# EAGLE board PCB_board (EAGLE 9.6.2)
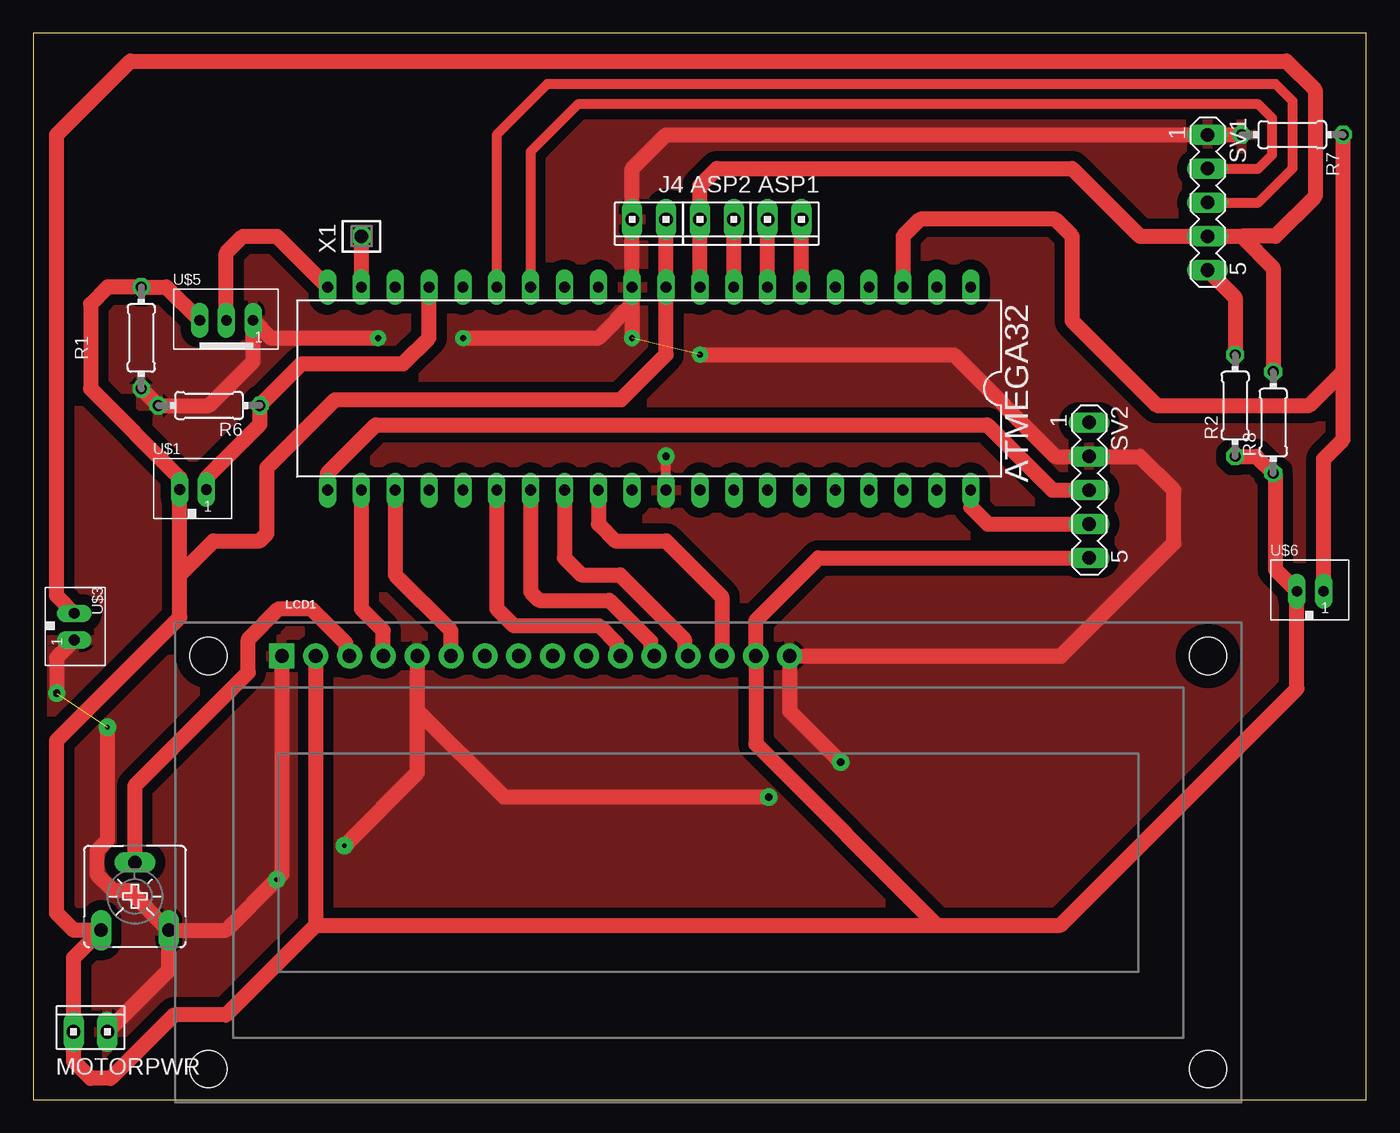
[diagram p0: board, top side]
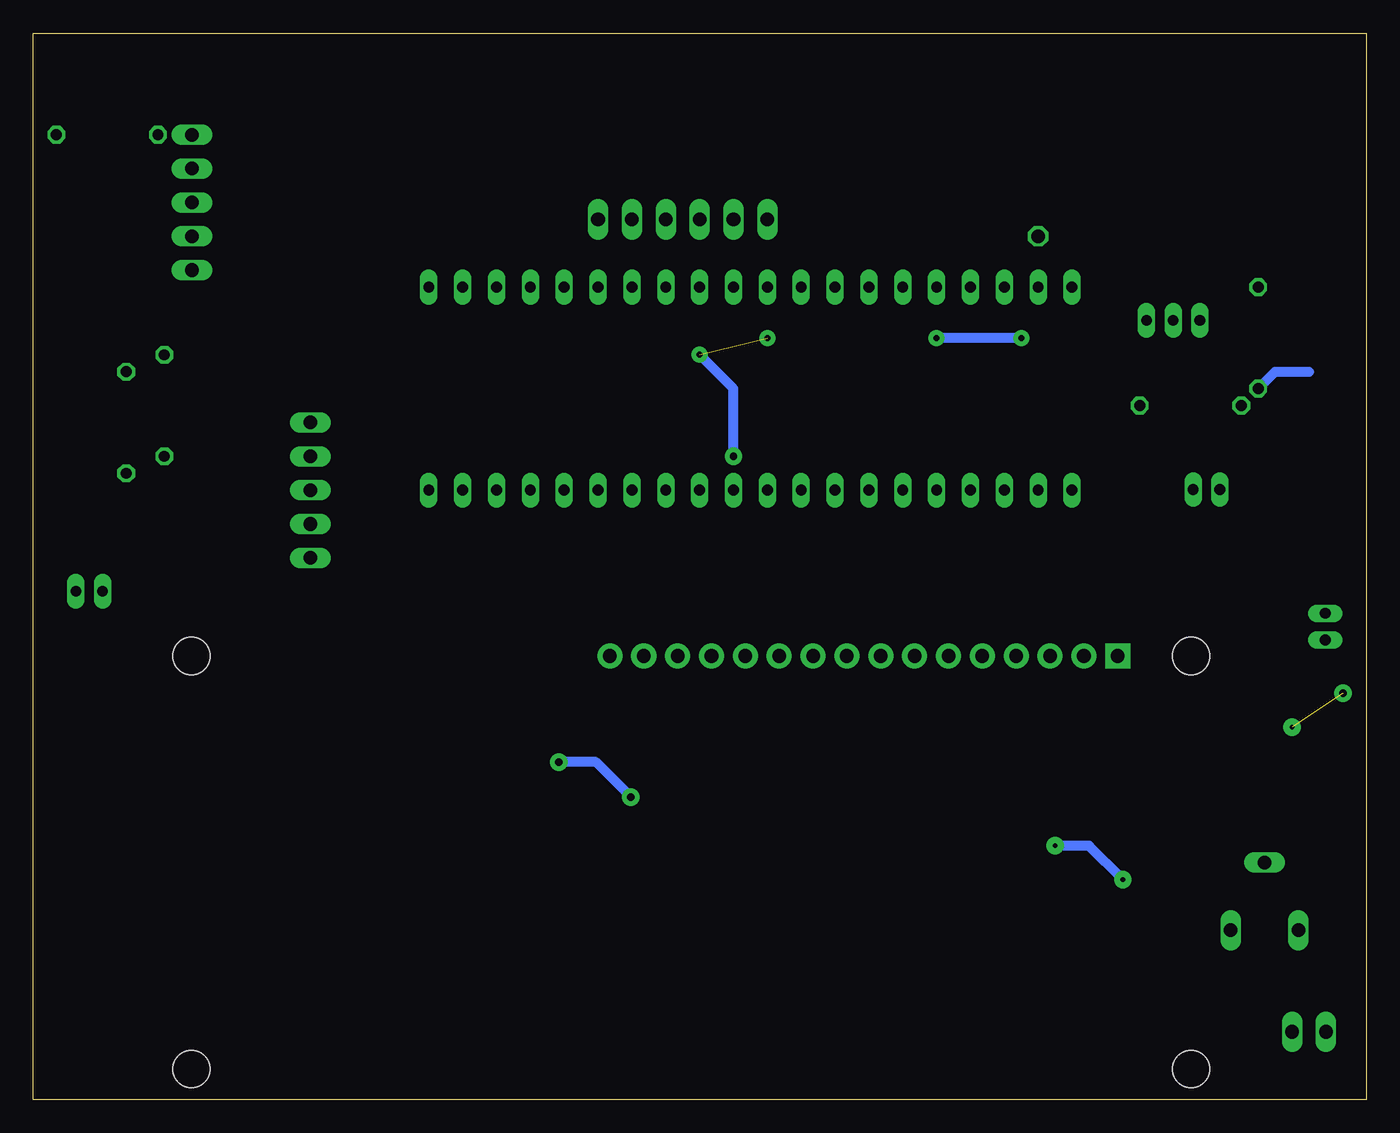
[diagram p1: board, bottom side, seen from below]

Size 100 x 80 mm. Coordinates in mm from the lower left corner, seen from the top.
Outline: 0,0 100,0 100,80 0,80 0,0
Copper layers (1*16): Top 0.035mm / dielectric 1.5mm / Bottom 0.035mm
Design rules "default *": minimum track width 30mil, minimum drill 0.35mm, track to track 30mil, track to pad 30mil, pad to pad 25mil, via to via 30mil, smd to smd 6mil, copper to edge 40mil, drill to drill 6mil, minimum pad ring 10mil, minimum via ring 8mil, stop-mask expansion 4mil, vias tented up to drill 0mil, thermal gap 10mil

## Footprints (pad centres in the part's own frame; a part is rotated, then mirrored left to right if it is on the bottom)
10X02MTA = drill 1.016 long: 1 1.27,0; 2 -1.27,0
DIL40 = drill 0.813 long: 1 -24.13,-7.62; 2 -21.59,-7.62; 3 -19.05,-7.62; 4 -16.51,-7.62; 5 -13.97,-7.62; 6 -11.43,-7.62; 7 -8.89,-7.62; 8 -6.35,-7.62; 9 -3.81,-7.62; 10 -1.27,-7.62; 11 1.27,-7.62; 12 3.81,-7.62; 13 6.35,-7.62; 14 8.89,-7.62; 15 11.43,-7.62; 16 13.97,-7.62; 17 16.51,-7.62; 18 19.05,-7.62; 19 21.59,-7.62; 20 24.13,-7.62; 21 24.13,7.62; 22 21.59,7.62; 23 19.05,7.62; 24 16.51,7.62; 25 13.97,7.62; 26 11.43,7.62; 27 8.89,7.62; 28 6.35,7.62; 29 3.81,7.62; 30 1.27,7.62; 31 -1.27,7.62; 32 -3.81,7.62; 33 -6.35,7.62; 34 -8.89,7.62; 35 -11.43,7.62; 36 -13.97,7.62; 37 -16.51,7.62; 38 -19.05,7.62; 39 -21.59,7.62; 40 -24.13,7.62
LCD-16X2_NOSILK = drill 1.016 pad 1.88 square: 1 -32,15.5 | drill 1.016 pad 1.88: 2 -29.46,15.5; 3 -26.92,15.5; 4 -24.38,15.5; 5 -21.84,15.5; 6 -19.3,15.5; 7 -16.76,15.5; 8 -14.22,15.5; 9 -11.68,15.5; 10 -9.14,15.5; 11 -6.6,15.5; 12 -4.06,15.5; 13 -1.52,15.5; 14 1.02,15.5; 15 3.56,15.5; 16 6.1,15.5 | hole 2.8: -37.5,15.5; -37.5,-15.5; 37.5,15.5; 37.5,-15.5
0204/7 = drill 0.813 octagon: 1 -3.81,0; 2 3.81,0
CA6V = drill 1.016 long: A -2.54,-2.54; E 2.54,-2.54; S 0,2.54
MA05-1 = drill 1.016 long: 1 -5.08,0; 2 -2.54,0; 3 0,0; 4 2.54,0; 5 5.08,0
JST_B2B-PH_HEADER = drill 0.8 long: P1 1.075,0.048; P2 -0.925,0.048
JST_B3B-PH_HEADER = drill 0.8 long: P1 2.027,0.048; P2 0.028,0.048; P3 -1.972,0.048
SSW-101-02-G-S = drill 1 pad 1.5 octagon: 1 0,0

## Placement (x,y rotation side)
ASP1  [10X02MTA]  56.36,66.04 180 top
ASP2  [10X02MTA]  51.28,66.04 180 top
ATMEGA32  MEGA32-P  [DIL40]  46.2,53.34 180 top
J4  [10X02MTA]  46.2,66.04 180 top
LCD1  LCD-16X2NOSILK  [LCD-16X2_NOSILK]  50.64,17.78 0 top
MOTORPWR  [10X02MTA]  4.29,5.08 0 top
R1  [0204/7]  8.1,57.15 90 top
R2  [0204/7]  90.17,52.07 90 top
R3  [CA6V]  7.62,15.24 0 top
R6  [0204/7]  13.18,52.07 180 top
R7  [0204/7]  94.46,72.39 180 top
R8  [0204/7]  93.03,50.8 90 top
SV1  [MA05-1]  88.11,67.31 270 top
SV2  [MA05-1]  79.22,45.72 270 top
U$1  JST-PH_2-PIN_HEADER  [JST_B2B-PH_HEADER]  11.91,45.72 0 top
U$3  JST-PH_2-PIN_HEADER  [JST_B2B-PH_HEADER]  3.02,35.56 270 top
U$5  JST-PH_3-PIN_HEADER  [JST_B3B-PH_HEADER]  14.45,58.42 0 top
U$6  JST-PH_2-PIN_HEADER  [JST_B2B-PH_HEADER]  95.73,38.1 0 top
X1  SSW-101-02-G-S  [SSW-101-02-G-S]  24.61,64.77 0 top

## Library data of the parts
ASP1 ASP2 J4 MOTORPWR = con-amp
ATMEGA32 = atmel; MPN: ATMEGA32-16PU; OC_FARNELL: 1661729; OC_NEWARK: 51P1794
LCD1 = SparkFun-Displays; SF_ID: LCD-00255
R1 R2 R6-R8 = rcl; SPICEPREFIX: R
R3 = pot
SV1 SV2 = con-lstb; OC_FARNELL: unknown; OC_NEWARK: unknown
U$1 U$3 U$6 = srg
U$5 = srg; JST: 3
X1 = con-samtec; MF: Samtec Inc.; MPN: SSW-101-02-G-S; OC_FARNELL: unknown; OC_NEWARK: 11P9336

## Nets
AVCC: ATMEGA32.30
DB4: ATMEGA32.26 LCD1.11
DB5: ATMEGA32.27 LCD1.12
DB6: ATMEGA32.28 LCD1.13
DB7: ATMEGA32.29 LCD1.14
E: ATMEGA32.23 LCD1.6
GND: ATMEGA32.11 ATMEGA32.31 J4.1 LCD1.1 LCD1.5 LCD1.16 MOTORPWR.1 R1.1 R3.E R6.2 R7.2 SV1.1 SV2.2 U$3.P1 U$5.P1
MISO: ASP1.1 ATMEGA32.7
MOSI: ASP1.2 ATMEGA32.6
N$3: R2.2 SV1.5
N$15: ATMEGA32.3 R7.1 U$6.P1
N$19: ATMEGA32.17 R6.1 U$1.P1
PA0: ATMEGA32.40 SV2.4
PD5: ATMEGA32.19 X1.1
PD6: ATMEGA32.20 U$5.P2
PD7: ATMEGA32.21 SV2.3
RS: ATMEGA32.22 LCD1.4
RST: ASP2.1 ATMEGA32.9 R8.2 SV1.4 U$3.P2
RXD: ATMEGA32.14 SV1.2
SCK: ASP2.2 ATMEGA32.8
TXD: ATMEGA32.15 SV1.3
V0: LCD1.3 R3.S
VCC: ATMEGA32.10 J4.2 LCD1.2 LCD1.15 MOTORPWR.2 R1.2 R2.1 R3.A R8.1 SV2.5 U$1.P2 U$5.P3 U$6.P2

## Tracks (layer width: path | path; a pad name or v marks a point on that pad's centre or on a via)
DB4
  Top 1.143: ATMEGA32.26 34.77,36.83 36.05,35.55 42.44,35.55 43.77,34.22 43.77,33.55 LCD1.11
DB5
  Top 1.143: ATMEGA32.27 37.31,38.1 37.95,37.46 43.23,37.46 46.31,34.38 46.31,33.55 LCD1.12
DB6
  Top 1.143: ATMEGA32.28 39.85,40.64 41.13,39.36 44.02,39.36 48.85,34.53 48.85,33.55 LCD1.13
DB7
  Top 1.143: ATMEGA32.29 42.39,43.18 43.66,41.91 47.47,41.91 51.66,37.72 LCD1.14
E
  Top 1.143: ATMEGA32.23 27.15,39.37 31.34,35.18 LCD1.6
GND  (via drill 0.35 pad 1.3, 0.45 pad 1.2, 0.55 pad 1.3)  (2 unrouted)
  Top 0.762: ATMEGA32.31 v47.47,48.26
  Top 1.143: R3.E 14.45,12.7 v18.26,16.51 18.64,16.89 LCD1.1 | LCD1.5 28.8,29.21 | 28.8,29.21 28.8,24.51 v23.34,19.05 | 28.8,29.21 35.31,22.7 v55.17,22.7 | v60.57,25.32 56.74,29.15 LCD1.16 77.1,33.28 85.57,41.75 85.57,45.72 83.03,48.26 SV2.2 76.68,48.26 69.06,55.88 v50.01,55.88 | MOTORPWR.1 10.16,9.68 R3.E | v5.56,27.94 5.56,19.45 4.76,18.65 4.76,16.91 5.99,15.68 7.17,15.68 R3.E | U$3.P1 1.75,33.17 v1.75,30.48 | v25.88,57.15 17.8,57.15 U$5.P1 16.48,55.37 13.18,52.07 R6.2 R1.1 | ATMEGA32.11 44.93,59.69 42.39,57.15 v32.23,57.15 | ATMEGA32.11 v44.93,57.15 | R7.2 SV1.1 47.47,72.39 44.93,69.85 J4.1 ATMEGA32.11
  Bottom 0.762: v55.17,22.7 57.79,25.32 v60.57,25.32 | v18.26,16.51 20.8,19.05 v23.34,19.05 | v47.47,48.26 47.47,53.34 v50.01,55.88 | v25.88,57.15 v32.23,57.15 | R1.1 6.83,54.61 4.29,54.61
  pour Top: 0,80 100,80 100,0 0,0
MISO
  Top 1.143: ATMEGA32.7 ASP1.1
MOSI
  Top 1.143: ATMEGA32.6 ASP1.2
N$3
  Top 1.143: SV1.5 90.17,60.17 R2.2
N$15
  Top 1.143: U$6.P1 96.81,48.06 98.27,49.53 98.27,54.61 | 98.27,54.61 R7.1 | ATMEGA32.3 65.25,64.77 66.52,66.04 76.68,66.04 77.95,64.77 77.95,58.42 84.3,52.07 95.73,52.07 98.27,54.61
N$19
  Top 1.143: ATMEGA32.17 29.69,57.15 27.76,55.22 20.14,55.22 R6.1 16.99,50.65 12.98,46.64 U$1.P1
PA0
  Top 1.143: ATMEGA32.40 70.33,44.45 71.6,43.18 SV2.4
PD5
  Top 1.143: X1.1 ATMEGA32.19
PD6
  Top 0.762: U$5.P2 14.45,58.49
  Top 1.143: U$5.P2 14.48,63.53 15.72,64.77 18.26,64.77 ATMEGA32.20
PD7
  Top 1.143: ATMEGA32.21 22.07,46.99 25.69,50.61 71.56,50.61 76.45,45.72 SV2.3
RS
  Top 1.143: ATMEGA32.22 24.61,36.83 26.26,35.18 LCD1.4
RST
  Top 1.143: ATMEGA32.9 ASP2.1 50.01,68.58 51.28,69.85 77.95,69.85 83.03,64.77 SV1.4 90.65,64.77 | 90.65,64.77 93.19,64.77 96.17,67.75 96.17,75.75 94.02,77.92 7.27,77.92 1.75,72.39 1.75,37.8 U$3.P2 | 90.65,64.77 93.03,62.39 R8.2
RXD
  Top 0.762: ATMEGA32.14 37.31,71.12 40.87,74.68 91.92,74.68 92.94,73.66 92.94,70.87 91.92,69.85 SV1.2
SCK
  Top 1.143: ATMEGA32.8 ASP2.2
TXD
  Top 0.762: ATMEGA32.15 34.77,72.39 38.58,76.2 93.19,76.2 94.46,74.93 94.46,69.85 91.92,67.31 SV1.3
V0
  Top 1.143: LCD1.3 23.45,33.55 23.45,34.22 20.84,36.83 18.42,36.83 16.13,34.53 16.13,32.04 7.62,23.54 R3.S
VCC
  Top 1.143: LCD1.2 21.18,13.08 | 21.18,13.08 14.45,6.35 10.55,6.35 5.79,1.59 4.29,1.59 3.02,2.86 MOTORPWR.2 3.02,10.64 R3.A 3.02,12.7 1.75,13.97 1.75,26.93 10.98,36.17 10.98,39.37 | 21.18,13.08 67.79,13.08 | 67.79,13.08 77.06,13.08 94.81,30.82 U$6.P2 93.19,39.76 93.19,46.83 R8.1 91.76,48.26 R2.1 | 67.79,13.08 54.2,26.67 LCD1.15 54.2,35.94 58.9,40.64 SV2.5 | 10.98,39.37 U$1.P2 10.98,46.65 4.29,53.34 4.29,59.69 5.56,60.96 R1.2 9.98,60.96 U$5.P3 | 10.98,39.37 13.52,41.91 16.99,41.91 17.54,42.46 17.54,47.42 22.63,52.51 44.11,52.51 47.47,55.88 ATMEGA32.10 J4.2